# Altium PCB 锂电池充电器PCB图.PcbDoc
Units mil, origin at the board's own origin, x right, y up, seen from the top; angles counter-clockwise.
Board outline 1600 x 670 mil, 2 copper layers (Top Layer, Bottom Layer); 13 components, 9 nets, 45 pads, 14 vias.
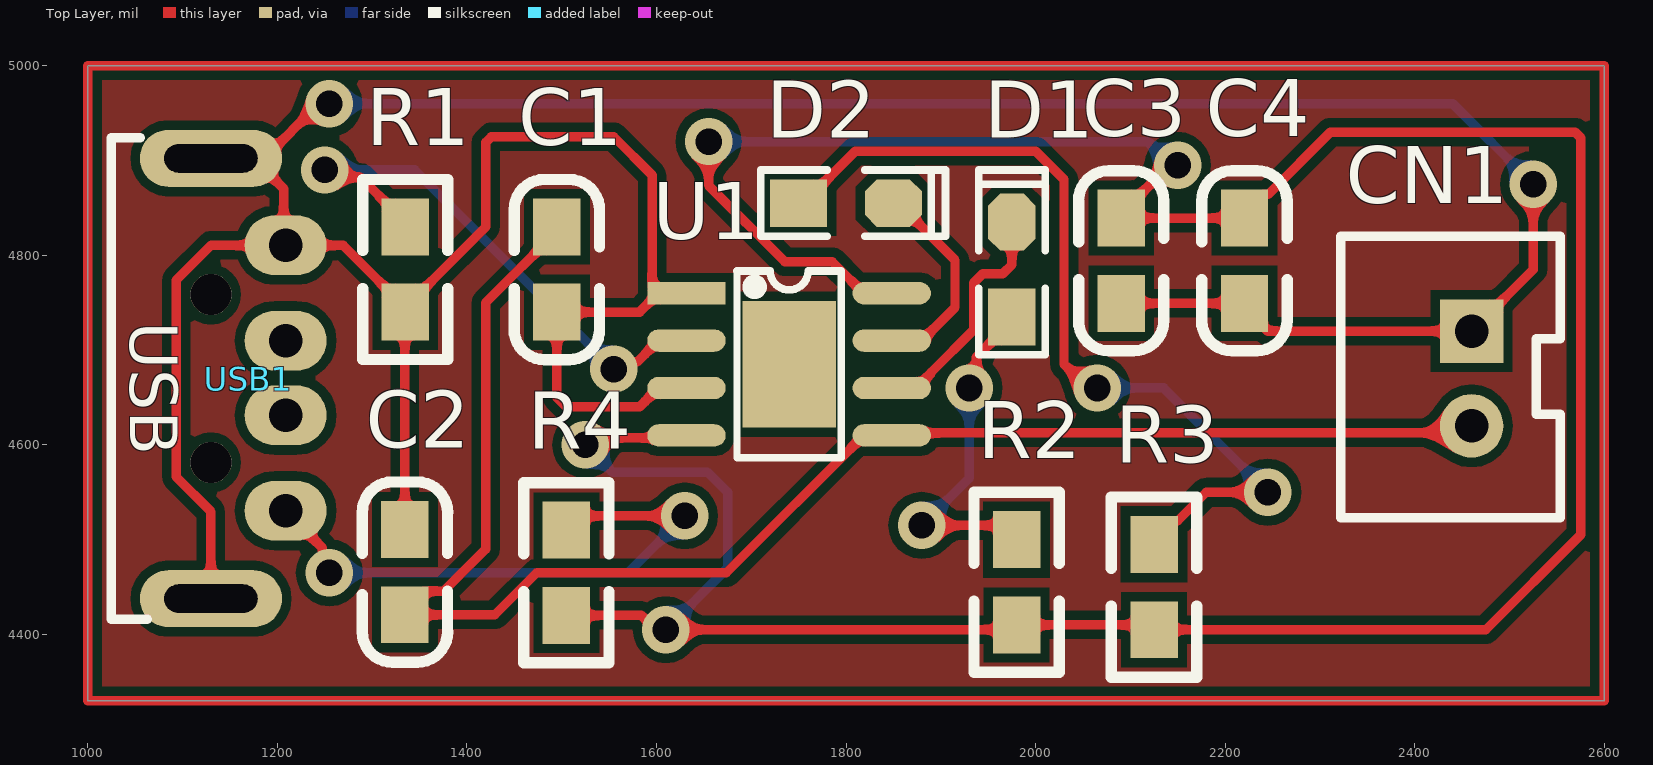
[diagram p0: Top Layer view]
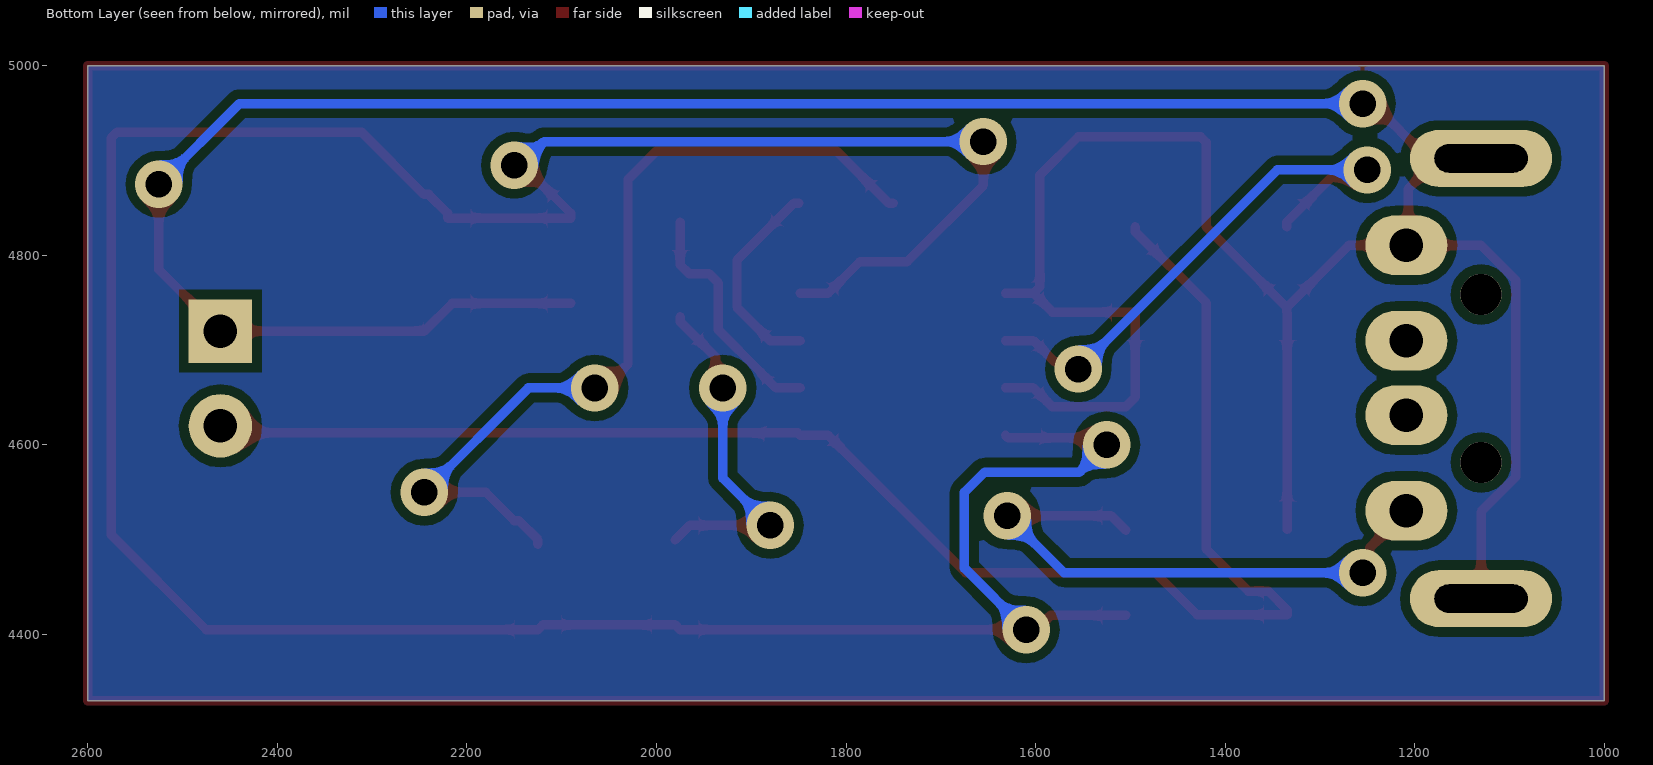
[diagram p1: Bottom Layer view, seen from below]
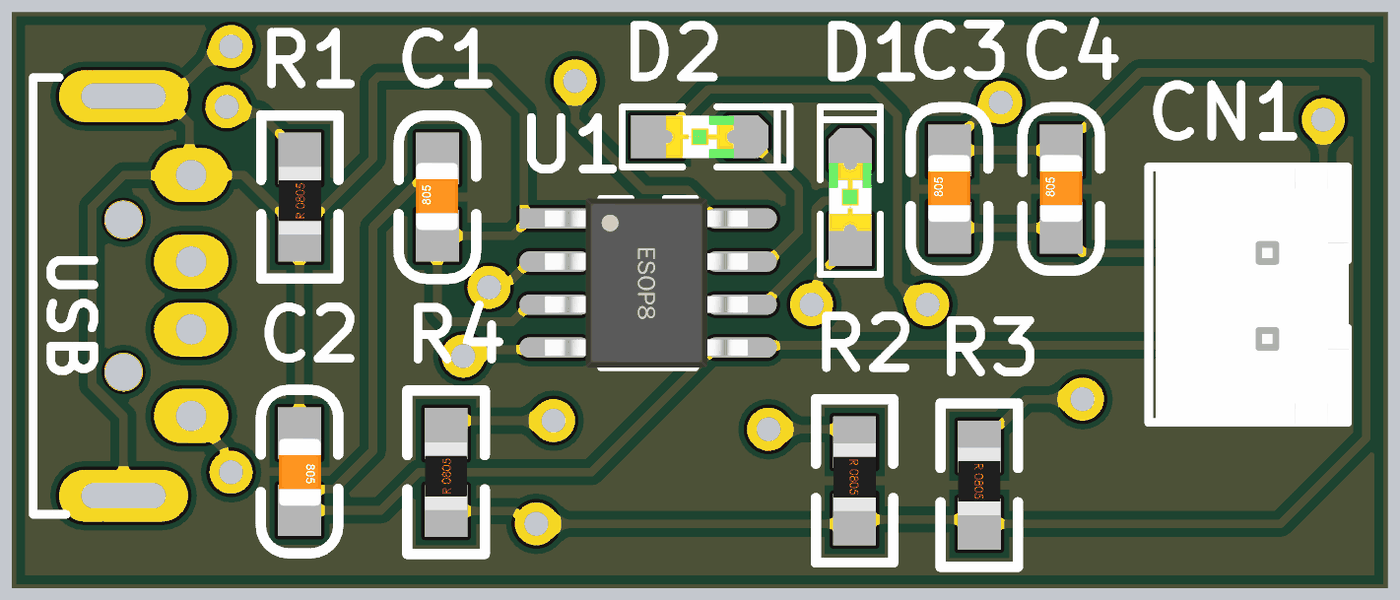
[diagram p2: 3D render of the assembled board from above, using the file's embedded part models]

## Layer stack, top to bottom
Top Solder: solder mask 0.4, Solder Resist, Dk 3.5
Top Layer: signal copper 1.4
Dielectric 1: dielectric 12.6, FR-4, Dk 4.8
Bottom Layer: signal copper 1.4
Bottom Solder: solder mask 0.4, Solder Resist, Dk 3.5

## Board outline
1000,4330 1000,5000 2600,5000 2600,4330

## Design rules (kind name [scope] priority, off if disabled: settings)
Clearance [All] p1: gap=10 ignorepadtopadclearanceinfootprint=FALSE except(0: Arc-Hole Track-Hole SMDPad-Hole THPad-Hole Via-Hole Fill-Hole Poly-Hole Region-Hole Text-Hole)
PolygonConnect [All] p1: connectstyle=Relief reliefconductorwidth=10 reliefentries=4 polygonreliefangle="90 Angle" airgapwidth=10
RoutingVias [All] p1: holewidth=28 width=50 viastyle="Through Hole" minholewidth=28 minwidth=50 maxholewidth=28 maxwidth=50
SolderMaskExpansion [All] p1: expansion=4 istentingtop=FALSE
Width [All] p1: maxlimit=10 minlimit=10 preferedwidth=10
30 further rules are at their usual default settings.

## Components (designator, comment, footprint, x,y, rotation, side; value= is the part's Value field where it differs from the comment)
C1 "10uF" 0805C 1494.6,4740.71 r90 top
C2 "0.1uF" 0805C 1335,4510 r270 top
C3 "0.1uF" 0805C 2090,4750 r90 top
C4 "10uF" 0805C 2220,4750 r90 top
CN1 "XH-2A" XH-2P 2460,4670 r270 top
D1 "LED" "LED 0805B" 1975,4785 r90 top
D2 "LED" "LED 0805B" 1800,4855 r0 top
R1 "1.2K" 0805R 1335,4740 r90 top
R2 "10K" 0805R 1980,4500 r270 top
R3 "2K" 0805R 2125,4495 r270 top
R4 "0.25R" 0805R 1505,4420 r90 top
U1 "TP4056" ESOP8 1740,4685 r0 top
USB1 "USB" "USB_A 插头" 1130,4670 r270 top

## Footprints (in the part's own frame and the unit in brackets; to place one, negate y for a bottom-side part, rotate by r counter-clockwise, add the part's x,y. Pads: shape width x height; smd on the part's side, far side on the other; paste and mask are expansions set on the pad)
0805C [mil] "[3D]电容封装"
  rect 60x50 smd: 1(-0.71,-0.4) 2(89.29,-0.4)
  silkscreen extent -51,-45 139,45, body extent 6,-25 84,25, height 31
0805R [mil] "[3D]电阻封装"
  rect 60x50 smd: 1(0,0) 2(90,0)
  silkscreen extent -50,-45 140,45, body extent 1,-25 80,25, height 15
ESOP8 [mm] "[3D]芯片封装"
  rect 2.1x0.6 smd: 1(-2.75,1.905)
  oval 2.1x0.6 smd: 2(-2.75,0.635) 3(-2.75,-0.635) 4(-2.75,-1.905) 5(2.75,-1.905) 6(2.75,-0.635) 7(2.75,0.635) 8(2.75,1.905)
  rect 2.5x3.4 smd paste-2: 9(0,0)
  rect 0.9x0.7 on Top Paste: 10(-0.625,-1.1) 10(-0.625,0) 10(-0.625,1.1) 11(0.65,-1.1) 11(0.65,0) 11(0.65,1.1)
  silkscreen extent -1.4,-2.5 1.4,2.5, body extent -3.05,-2.5 2.95,2.5, height 1.53
"LED 0805B" [mil] "[3D]蓝色0805LED"
  rect 60x50 smd: 1(-50,0)
  oct 60x50 smd: 2(50,0)
  silkscreen extent -90,-35 105,35, body extent -39,-25 39,25, height 32
"USB_A 插头" [mm] "[3D]A型USB 插头"
  round 1.1 hole 1.1: 0(-2.25,0) 0(2.25,0)
  oval 1.6x2.2 hole 0.9: 1(3.543,2) 2(0.987,2) 3(-1.013,2) 4(-3.569,2)
  oval 1.524x3.81 hole 0.762 slot 2.5 at 90 deg: 4(-5.9,0) 4(5.9,0)
  silkscreen extent -6.45,-2.67 6.45,-1.7, body extent -6.47,-17.9 6.47,2.1, height 3.25
XH-2P [mm] "[3D]插接件XH-2A-2P 2.54mm"
  rect 1.7x1.7 hole 0.9: 1(-1.27,0)
  round 1.7 hole 0.9: 2(1.27,0)
  silkscreen extent -3.81,-3.51 3.74,2.37, body extent -3.77,-3.3 3.77,2.4, height 7.05

## Part data
C1 C2 C3 C4: library part C, "贴片电容", BOM名称=无极性贴片电容, 淘宝ID="封装库来自淘宝 ID：黄晶宝石", 联系售后=https://shop463601444.taobao.com
CN1: "插接件", BOM_JLCPCB Part Class="Extended Part", BOM_Manufacturer=BOOMELE, BOM_Manufacturer Part=XH-2A, BOM_Supplier=LCSC, BOM_Supplier Part=C20079, spicePre=C, spiceSymbolName=XH-2A
D1 D2: "发光二极管", LatestRevisionDate=08-Jul-2005, LatestRevisionNote="Mech Layer 1 removed.", PackageReference=LED-0, Published=8-Jun-2000, Publisher="Altium Limited"
R1 R2 R3 R4: library part R, "贴片电阻", BOM名称=贴片电阻, 版权归属="来自淘宝 ID：黄晶宝石", 联系售后=https://shop463601444.taobao.com
U1: "充电芯片 ESOP8", BOM_JLCPCB Part Class="Extended Part", BOM_Manufacturer="UMW(Youtai Semiconductor Co., Ltd.)", BOM_Manufacturer Part=TP4056, BOM_Supplier=LCSC, BOM_Supplier Part=C725790, Contributor=LCSC, spicePre=U, spiceSymbolName=TP4056_C725790
USB1: "USB_Type-A 插头", BOM_JLCPCB Part Class="Extended Part", BOM_Manufacturer=SOFNG, BOM_Manufacturer Part=USB-05, BOM_Supplier=LCSC, BOM_Supplier Part=C112454, Contributor=LCSC, spicePre=U, spiceSymbolName=USB-05

## Via types
v1: diameter 50, hole 28, Top Layer to Bottom Layer, 14 vias

## Nets (pads, with @x,y where several pads share a name; then routed paths per layer and width w, separated by ;. In a path a pad name is that pad's centre, name@x,y a point inside that pad or via, vN(x,y) a via of type N, cw(c..) or ccw(c..) an arc to the next point about the centre after c; other vN are vias at no path point)
BAT: C1.2 C2.2 CN1.2 U1.5 | length 1696.1
  Top Layer w10: C1.2 1495,4825 1420,4750 1420,4490 1375.71,4445.71 1354.6,4445.71 1334.6,4425.71 C2.2 1429.49,4420.71 1473.79,4465 1673.74,4465 1818.74,4610 U1.5 1850.87,4612.61 2452.61,4612.61 CN1.2
GND: C1.1 C2.1 C3.1 C4.1 CN1.1 R1.1 U1.1 U1.3 USB1.4 | length 3908.8
  Top Layer w10: USB1.4@1130,4437.72 1130,4529.58 1093.35,4566.23 1093.35,4773.77 1130.1,4810.52 USB1.4@1208.74,4810.52 ; USB1.4@1130,4902.28 USB1.4@1174.84,4902.28 ; v1(1255,4960) 1244.18,4960 1186.46,4902.28 USB1.4@1174.84,4902.28 ; C2.1 1334.6,4739.6 R1.1 R1.1@1335,4745 ; U1.3 1602.2,4660 1582.2,4640 1505,4640 1495,4650 C1.1 1582.2,4740 U1.1@1602.2,4760 ; U1.1 U1.1@1602.2,4760 ; C3.1 2215.4,4749.29 2244.7,4720 CN1.1 2525,4785 v1(2525,4875) ; USB1.4@1174.84,4902.28 1206.74,4870.38 1206.74,4812.52 USB1.4@1208.74,4810.52 ; USB1.4@1208.74,4810.52 1269.48,4810.52 R1.1@1335,4745 ; R1.1@1335,4745 1420,4830 1420,4919.14 1425.86,4925 1555,4925 1595.39,4884.61 1595.39,4766.81 U1.1@1602.2,4760
  Bottom Layer w10: v1(1255,4960) 2440,4960 v1(2525,4875)
NetC3_2: C3.2 C4.2 R2.2 R3.2 R4.1 U1.4 U1.8 | length 3399.5
  Top Layer w10: R4.1 1584.18,4420 1599.18,4405 v1(1610,4405) 1975,4405 R2.2 2120,4410 R3.2 2475,4405 2575,4505 2575,4924.14 2569.14,4930 2311.11,4930 2245.4,4864.29 2240.4,4864.29 2220.4,4844.29 C4.2 C3.2 2090.4,4844.29 2141.11,4895 v1(2150,4895) ; v1(1525,4600) 1532.39,4607.39 1629.13,4607.39 U1.4 ; v1(1655,4920) 1655,4873.79 1735.59,4793.2 1785.54,4793.2 1818.74,4760 U1.8
  Bottom Layer w10: v1(1525,4600) 1553.83,4571.17 1653.83,4571.17 1675,4550 1675,4470 v1(1610,4405) ; v1(1655,4920) 2118.43,4920 2143.43,4895 v1(2150,4895)
NetD1_1: D1.1 R2.1 | length 365.6
  Top Layer w10: v1(1880,4515) 1965,4515 R2.1 ; v1(1930,4660) 1937.65,4667.65 1937.65,4692.65 1975,4730 D1.1
  Bottom Layer w10: v1(1880,4515) 1930,4565 v1(1930,4660)
NetD1_2: D1.2 U1.6 | length 255.1
  Top Layer w10: U1.6 1874.11,4660 1890,4675.89 1890,4676.57 1935,4721.57 1935,4771.21 1944.39,4780.61 1965.61,4780.61 1975,4790 D1.2
NetD2_1: D2.1 R3.1 | length 926.8
  Top Layer w10: D2.1 1755,4855 1810,4910 2000,4910 2030,4880 2030,4685 2055,4660 v1(2065,4660) ; R3.1 2125,4500 2145,4520 2150,4520 2180,4550 v1(2245,4550)
  Bottom Layer w10: v1(2065,4660) 2135,4660 v1(2245,4550)
NetD2_2: D2.2 U1.7 | length 221.1
  Top Layer w10: U1.7 1880,4710 1915,4745 1915,4795 1855,4855 D2.2
NetR1_2: R1.2 U1.2 | length 593.9
  Top Layer w10: v1(1250,4890) 1257.65,4882.35 1287.65,4882.35 1335,4835 R1.2 ; v1(1555,4680) 1562.65,4687.65 1579.86,4687.65 1602.2,4710 U1.2
  Bottom Layer w10: v1(1250,4890) 1345,4890 v1(1555,4680)
VCC: R4.2 USB1.1 | length 615.7
  Top Layer w10: USB1.1 1208.74,4530.17 1247.35,4491.56 1247.35,4472.65 v1(1255,4465) ; R4.2 1520,4525 v1(1630,4525)
  Bottom Layer w10: v1(1255,4465) 1570,4465 v1(1630,4525)
pads on no net: U1.9 U1.10 U1.11 USB1.0 USB1.2 USB1.3
copper on no net: | length 4540
  Top Layer w10: 1000,4330 1000,5000 2600,5000 2600,4330 1000,4330

## Polygon pours and split planes (outlines as drawn)
no net on Bottom Layer "NONET_L02_P001" (solid, pour order 1): 995,4345
no net on Bottom Layer "NONET_L02_P000" (solid, pour order 0): 1000,5000 2600,5000 2600,4330 1000,4330
no net on Top Layer "NONET_L01_P002" (solid, pour order 2): 1000,5000 2600,5000 2600,4330 1000,4330